# EAGLE board espcam_Rizqulloh (EAGLE 9.6.2)
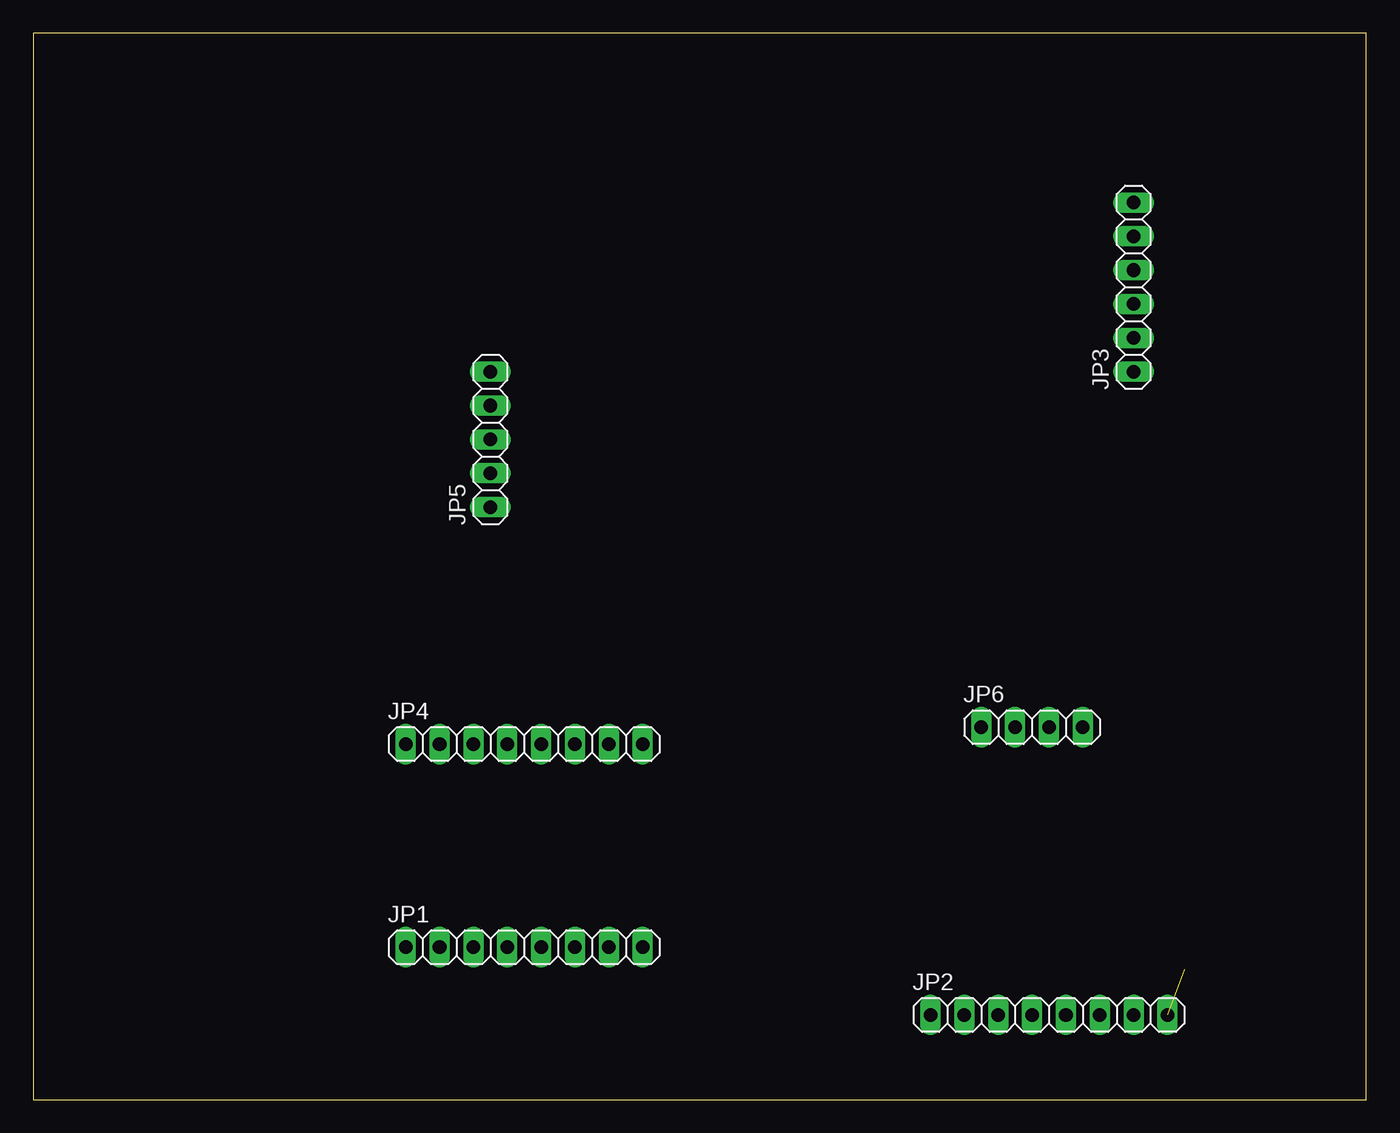
[diagram p0: board, top side]
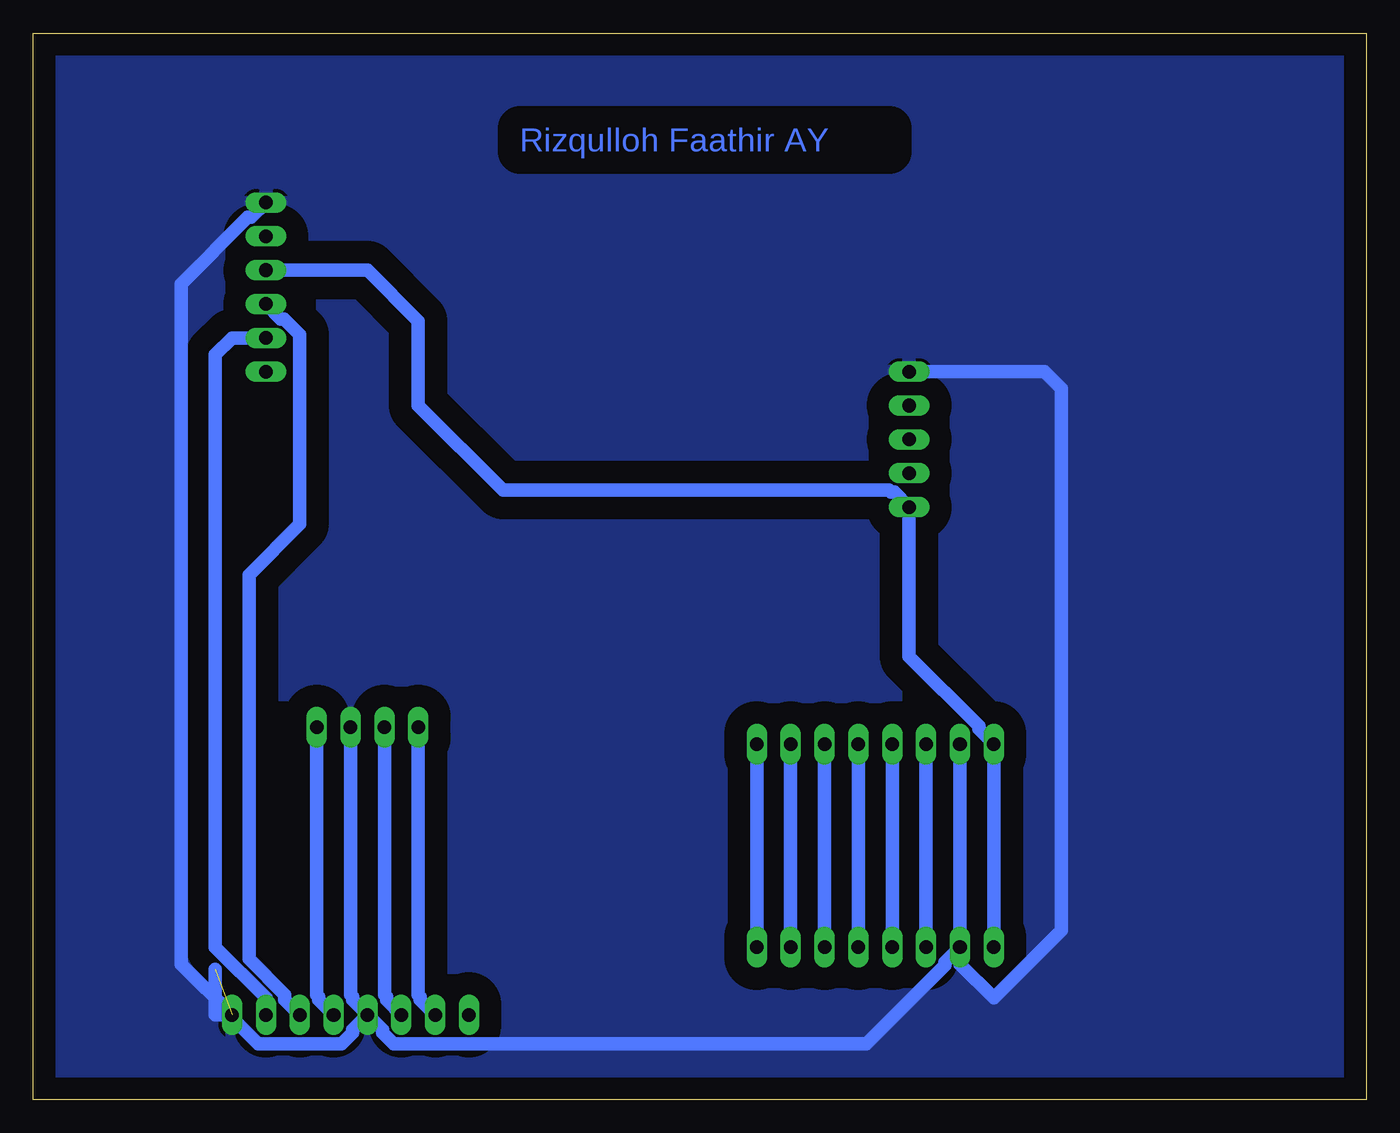
[diagram p1: board, bottom side, seen from below]

Size 100 x 80 mm. Coordinates in mm from the lower left corner, seen from the top.
Outline: 0,0 100,0 100,80 0,80 0,0
Copper layers (1*16): Top 0.035mm / dielectric 1.5mm / Bottom 0.035mm
Design rules "default": minimum track width 6mil, minimum drill 0.35mm, track to track 6mil, track to pad 6mil, pad to pad 6mil, via to via 6mil, smd to smd 6mil, copper to edge 40mil, drill to drill 6mil, minimum pad ring 10mil, minimum via ring 8mil, stop-mask expansion 4mil, vias tented up to drill 0mil, thermal gap 10mil

## Footprints (pad centres in the part's own frame; a part is rotated, then mirrored left to right if it is on the bottom)
1X08 = drill 1.016 long: 1 -8.89,0; 2 -6.35,0; 3 -3.81,0; 4 -1.27,0; 5 1.27,0; 6 3.81,0; 7 6.35,0; 8 8.89,0
1X06 = drill 1.016 long: 1 -6.35,0; 2 -3.81,0; 3 -1.27,0; 4 1.27,0; 5 3.81,0; 6 6.35,0
1X05 = drill 1.016 long: 1 -5.08,0; 2 -2.54,0; 3 0,0; 4 2.54,0; 5 5.08,0
1X04 = drill 1.016 long: 1 -3.81,0; 2 -1.27,0; 3 1.27,0; 4 3.81,0

## Placement (x,y rotation side)
JP1  [1X08]  36.83,11.43 0 top
JP2  [1X08]  76.2,6.35 0 top
JP3  [1X06]  82.55,60.96 90 top
JP4  [1X08]  36.83,26.67 0 top
JP5  [1X05]  34.29,49.53 90 top
JP6  [1X04]  74.93,27.94 0 top

## Library data of the parts
JP1-JP6 = pinhead

## Nets
3V3: JP2.1
5V: JP1.1 JP3.4 JP4.1 JP5.1
GND: JP1.2 JP2.4 JP2.8 JP3.6 JP4.2 JP5.5 JP6.3
IO0: JP2.3 JP6.2
IO2: JP1.7 JP4.7
IO4: JP1.8 JP4.8
IO12: JP1.3 JP4.3
IO13: JP1.4 JP4.4
IO14: JP1.6 JP4.6
IO15: JP1.5 JP4.5
IO16: JP2.2 JP6.1
RX: JP2.7 JP3.2
TX: JP2.6 JP3.3
VOUT: JP2.5 JP6.4

## Tracks (layer width: path | path; a pad name or v marks a point on that pad's centre or on a via)
5V
  Bottom 1.016: JP1.1 JP4.1 29.06,27.79 29.06,28.02 34.29,33.25 JP5.1 35.41,45.57 35.64,45.57 35.79,45.72 64.77,45.72 71.12,52.07 71.12,58.42 74.93,62.23 JP3.4
GND  (1 unrouted)
  Bottom 1.016: JP3.6 83.67,66.19 83.9,66.19 88.9,61.19 88.9,10.16 JP2.8 | JP6.3 76.2,7.85 76.05,7.7 76.05,7.47 JP2.4 | JP2.4 76.05,5.23 76.05,5 76.88,4.17 83.14,4.17 85.32,6.35 86.36,6.35 86.36,9.78 | JP1.2 JP4.2 | JP1.2 31.6,10.31 31.6,10.08 37.51,4.17 72.98,4.17 73.81,5 73.81,5.23 JP2.4 | JP5.5 24.13,54.61 22.86,53.34 22.86,12.7 27.94,7.62 30.48,10.16 JP1.2
  pour Bottom (isolate 1.676): 0,80.01 100.33,80.01 100.33,0 0,0
IO0
  Bottom 1.016: JP6.2 73.66,7.85 73.51,7.7 73.51,7.47 JP2.3
IO2
  Bottom 1.016: JP1.7 JP4.7
IO4
  Bottom 1.016: JP1.8 JP4.8
IO12
  Bottom 1.016: JP1.3 JP4.3
IO13
  Bottom 1.016: JP1.4 JP4.4
IO14
  Bottom 1.016: JP1.6 JP4.6
IO15
  Bottom 1.016: JP1.5 JP4.5
IO16
  Bottom 1.016: JP6.1 71.12,7.85 70.97,7.7 70.97,7.47 JP2.2
RX
  Bottom 1.016: JP3.2 85.09,57.15 86.36,55.88 86.36,11.43 82.55,7.62 JP2.7
TX
  Bottom 1.016: JP3.3 81.43,58.57 81.2,58.57 80.01,57.38 80.01,43.18 83.82,39.37 83.82,10.54 81.13,7.85 81.13,7.47 JP2.6
VOUT
  Bottom 1.016: JP6.4 78.74,7.85 78.59,7.7 78.59,7.47 JP2.5

## Text on the board
Bottom: Rizqulloh Faathir AY